# Altium PCB {TEX137}_F2837x_controlCARD_R1.3_PCB_PADS.PcbDoc (part 6 of 6)
Units mm, origin at the board's own origin, x right, y up, seen from the top; angles counter-clockwise.
Board outline 105.77 x 51.09 mm, 10 copper layers (Primary Side, Inner Layer 2, Inner Layer 3, Inner Layer 4, Inner Layer 5, Inner Layer 6, Inner Layer 7, Inner Layer 8, Inner Layer 9, Secondary Side), stack 1.634 mm thick; 292 components, 317 nets, 1400 pads, 1032 vias.
Unrouted connection lines stored in the file: 106.
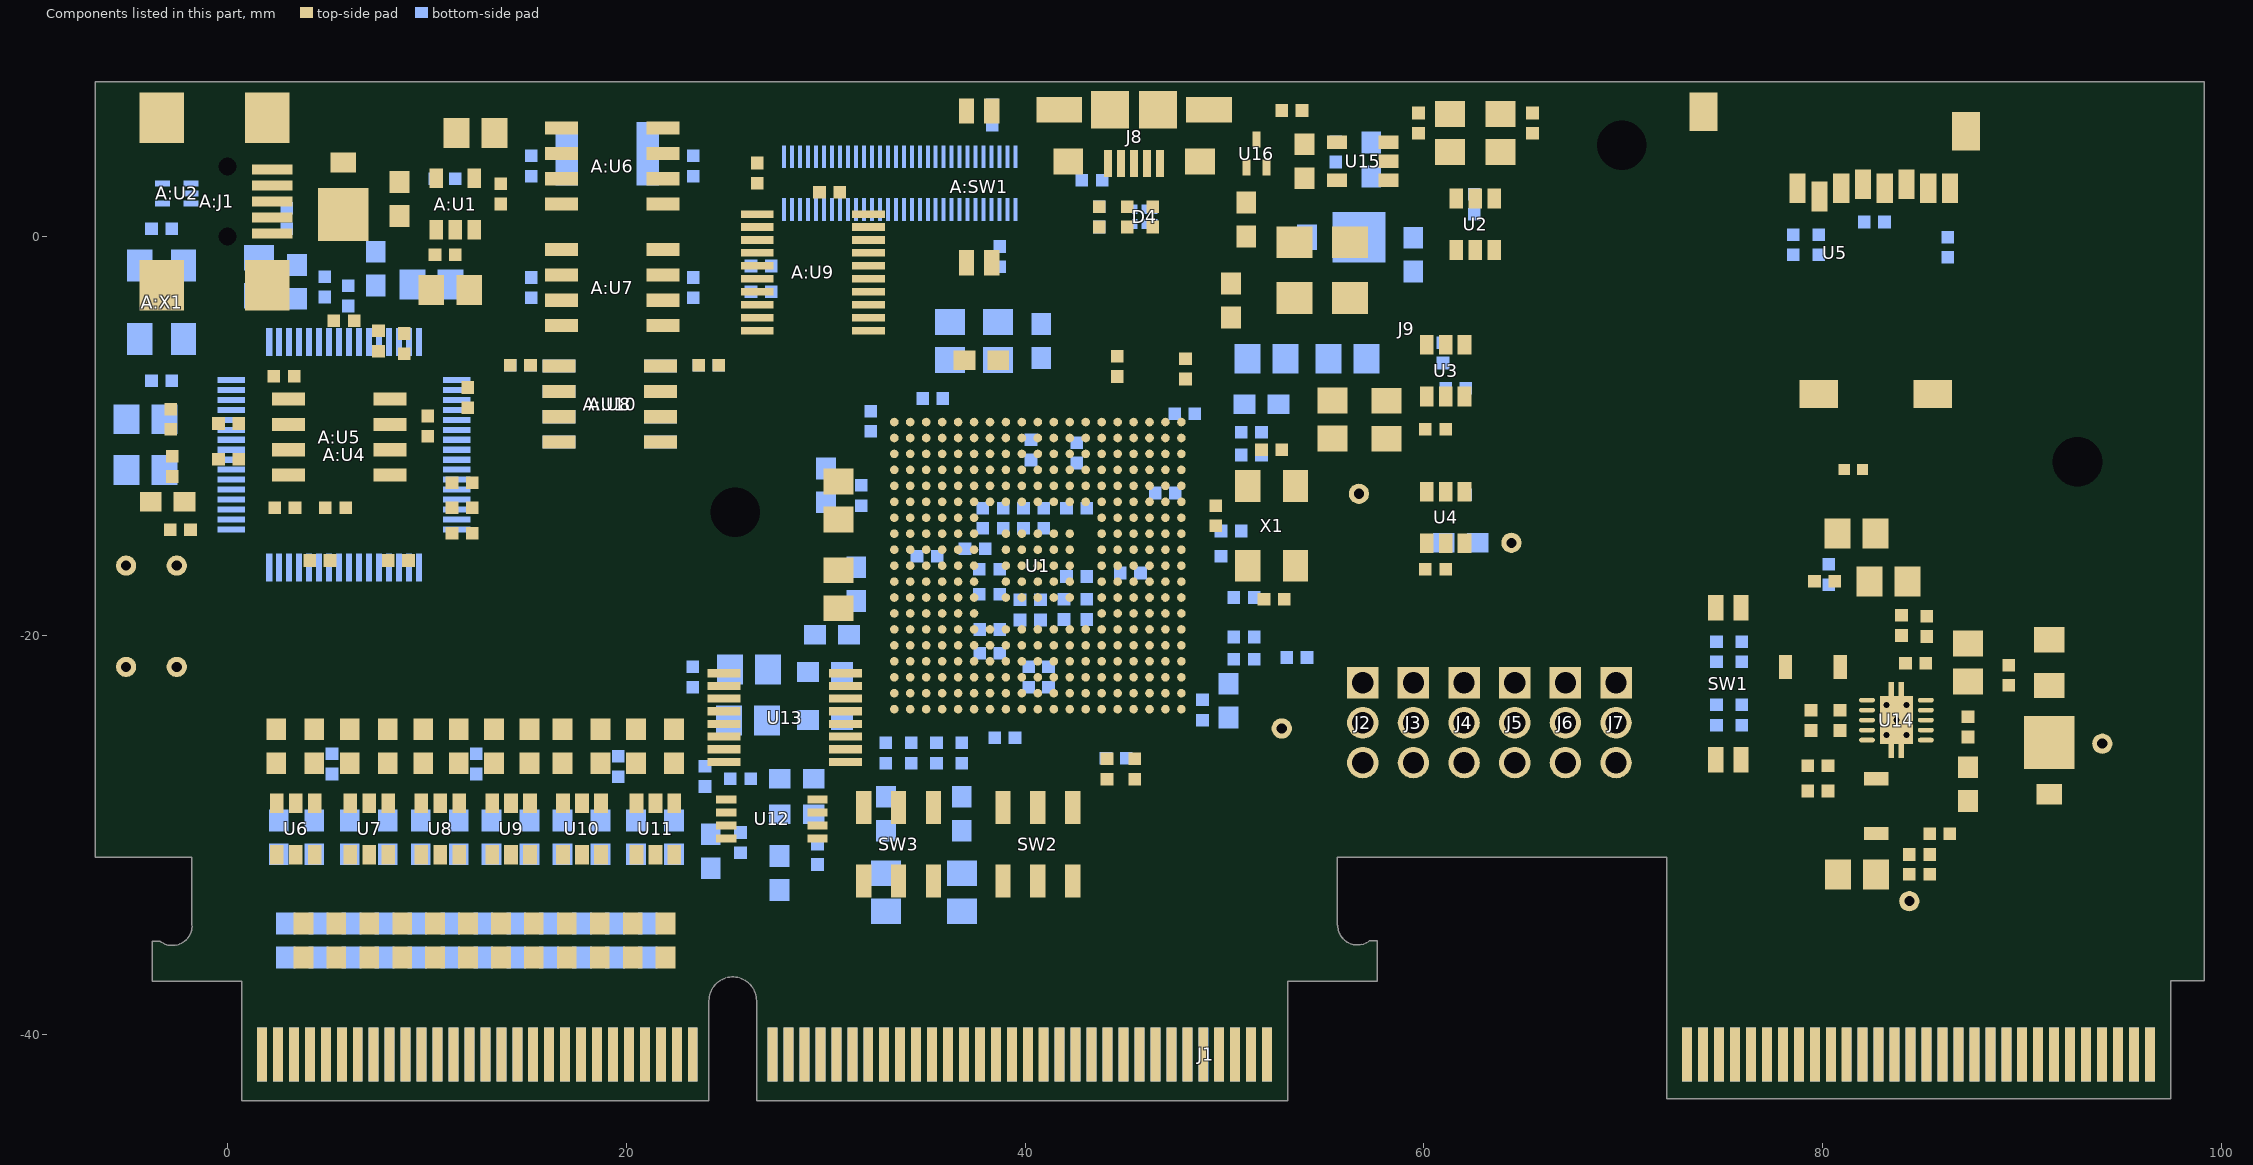
[diagram p14: the components of this part, seen from the top]

## Other copper
Primary Side:
  region net VDD_3V3: 78.359,-21.717 77.343,-21.717 77.343,-12.934 81.026,-12.934 81.026,-15.621 79.883,-15.621 79.883,-20.447 78.359,-20.447 78.359,-21.717
  region net USB_5V0: 92.075,-19.939 90.551,-19.939 90.551,-17.018 92.075,-17.018 92.075,-19.939
  region net HSEC_5V0: 90.043,-27.559 93.218,-27.559 93.218,-29.972 90.043,-29.972 90.043,-27.559
  region net VDD_MCU_3V3: 38.633,-6.046 41.415,-6.046 41.415,-7.29 38.633,-7.29 38.633,-6.046
  region net EMU_5V0: 6.223,2.413 7.747,2.413 7.747,0.254 6.223,0.254 6.223,2.413
  region net $$$4984: 82.423,-23.241 81.661,-23.241 81.661,-22.352 80.391,-22.352 80.391,-20.955 82.423,-20.955 82.423,-23.241
  region net $$$6167: 81.963,-25.184 82.578,-25.184 82.578,-27.328 81.963,-27.328 81.963,-25.184
  text "1" at 129.694,-158.686 h1.91
  text "Primary Side" at 164.875,-159.049 h1.91
Inner Layer 3:
  text "8" at 129.286,-158.686 h1.91
  text "Internal Signal 4" at 162.794,-159.049 h1.91
Inner Layer 4:
  text "4" at 129.241,-158.686 h1.91
  text "Internal Signal 2" at 162.839,-159.049 h1.91
Inner Layer 7:
  text "7" at 129.286,-158.686 h1.91
  text "Internal Signal 3" at 162.839,-159.049 h1.91
Inner Layer 8:
  text "3" at 129.286,-158.686 h1.91
  text "Internal Signal 1" at 163.247,-159.049 h1.91
Secondary Side:
  region net HSEC_5V0: 93.218,-27.559 91.821,-27.559 91.821,-29.972 93.218,-29.972 93.218,-27.559
  region net USB_5V0: 91.948,-19.685 90.678,-19.685 90.678,-17.145 91.948,-17.145 91.948,-19.685
  region net VDD_3V3: 35.992,-3.595 34.709,-3.595 34.709,-5.001 35.992,-5.001 35.992,-3.595
  region net VDD_MCU_3V3: 38.633,-5.944 41.425,-5.944 41.425,-7.29 38.633,-7.29 38.633,-5.944
  text "TEX137" at -5.651,-29.426 h0.76 r270
  text "F2837x controlCARD R1.3" at 96.799,-30.96 h0.76 r270
  text "Pb" at 96.647,-34.437 h0.64 r270
  text "10" at 128.588,-158.686 h1.91
  text "Secondary Side" at 163.129,-159.049 h1.91
Inner Layer 2 (plane layer: these items are gaps in the copper):
  region: 17.78,8.1 20.32,8.1 20.32,-19.837 19.837,-20.32 -6.998,-20.32 -6.998,-17.78 17.145,-17.78 17.78,-17.145 17.78,8.1
  lines w0.254: 18.335,-19.117 18.906,-19.688 ; 18.923,-19.685 37.465,-19.685 37.465,-22.86 38.227,-22.86 38.227,-23.749 37.465,-23.749 37.465,-35.75 36.195,-35.75
  lines w1.27: -3.364,-35.359 -3.77,-35.359 -3.77,-37.341 0.725,-37.341 0.725,-43.335 24.147,-43.335 24.147,-38.331 cw(c25.341,-38.331) 26.535,-38.331 26.535,-43.335 53.176,-43.335 53.176,-37.341 57.672,-37.341 57.672,-35.334 57.266,-35.334 ; -3.363,-35.36 ccw(c-2.766,-34.57) -1.776,-34.521 -1.789,-34.521 -1.789,-31.143 -6.704,-31.143 -6.704,7.752 99.125,7.752 99.125,-37.338 97.464,-37.338 97.464,-43.233 72.183,-43.233 72.183,-31.143 55.666,-31.143 55.666,-34.547 55.678,-34.547 ccw(c56.669,-34.543) 57.267,-35.334
  text "2" at 129.286,-158.686 h1.91
  text "Internal Plane 1" at 163.646,-158.686 h1.91
Inner Layer 5 (plane layer: these items are gaps in the copper):
  region: 57 vertices and 4 holes, not listed, extent -6.64,-43.335 99.125,7.752
  region: 53.848,-26.924 55.753,-26.924 55.753,-30.099 53.848,-30.099 53.848,-26.924
  lines w0.254: 23.495,-38.265 23.495,-41.021 2.286,-41.021 2.286,-36.449 -0.889,-36.449 -0.889,-30.353 -6.071,-30.353 -6.071,-20.32 19.787,-20.32 19.787,-19.812 37.338,-19.812 37.338,-22.987 38.1,-22.987 38.1,-23.622 37.338,-23.622 37.338,-35.623 36.068,-35.623 36.068,-35.877 37.592,-35.877 37.592,-23.876 38.354,-23.876 38.354,-22.733 37.592,-22.733 37.592,-19.558 20.32,-19.558 20.32,7.1 98.45,7.1 98.45,-36.664 96.799,-36.664 96.799,-41.402 73.152,-41.402 73.152,-30.099 55.372,-30.099 55.372,-14.605 82.296,-14.605 82.296,-34.671 88.773,-34.671 88.773,-7.112 54.483,-7.112 54.483,-9.017 50.673,-9.017 50.673,-11.176 35.306,-11.176 35.306,-17.78 39.243,-17.78 39.243,-26.924 54.483,-26.924 54.483,-36.474 51.943,-36.474 51.943,-40.894 27.178,-40.894 27.178,-38.265 ; 23.495,-38.264 cw(c25.336,-38.348) 27.178,-38.264 ; -6.045,-17.78 17.247,-17.78 17.755,-17.272 17.755,7.1 -6.045,7.1 -6.045,-17.78 ; 35.687,-17.526 35.687,-11.557 51.308,-11.557 51.308,-9.398 58.342,-9.398 58.342,-13.991 54.483,-13.991 54.483,-26.416 39.624,-26.416 39.624,-17.526 35.687,-17.526 ; 54.737,-9.064 54.737,-7.62 88.392,-7.62 88.392,-34.29 82.677,-34.29 82.677,-14.097 58.647,-14.097 58.647,-9.064 54.737,-9.064
  text "6" at 129.331,-158.686 h1.91
  text "Internal Plane 3" at 163.238,-158.686 h1.91
Inner Layer 6 (plane layer: these items are gaps in the copper):
  region: 17.78,8.1 20.32,8.1 20.32,-19.799 19.799,-20.32 -6.998,-20.32 -6.998,-17.78 17.145,-17.78 17.78,-17.145 17.78,8.1
  lines w0.254: 22.606,-22.022 2.261,-22.022 2.261,-22.631 -6.718,-22.631 -6.718,-31.179 -1.638,-31.179 -1.638,-33.846 41.783,-33.846 41.783,-25.4 37.46,-25.4 37.46,-23.764 38.245,-23.764 38.245,-22.854 37.47,-22.854 37.47,-19.677 32.766,-19.677 32.766,-19.152 ; 22.606,-22.022 22.606,-19.685 ; 22.606,-22.022 22.606,-19.685 ; 22.606,-22.022 2.286,-22.022 2.286,-22.631 -6.985,-22.631 -6.985,-19.253 18.466,-19.253 18.466,7.696 98.882,7.696 98.882,-23.241 73.965,-23.241 73.965,-17.907 54.28,-17.907 54.28,-27.711 41.783,-27.711 41.783,-25.451 40.411,-25.451 40.411,-19.38 43.409,-19.38 43.409,-24.105 48.92,-24.105 48.92,-16.561 50.952,-16.561 50.952,-6.401 29.312,-6.401 29.312,-11.684 ; 22.606,-19.685 28.778,-19.685 ; 22.606,-19.685 28.778,-19.685 ; 28.778,-19.685 28.778,-19.152 32.766,-19.152 ; 28.778,-19.685 28.778,-19.177 30.404,-19.177 30.404,-11.684 29.312,-11.684 ; 29.312,-11.684 29.312,-6.414 48.146,-6.414 ; 29.312,-11.684 30.378,-11.684 30.378,-19.152 32.766,-19.152 ; 32.766,-19.152 32.766,-19.664 37.483,-19.664 37.483,-22.842 38.247,-22.842 38.247,-23.782 37.465,-23.782 37.465,-25.4 40.374,-25.4 40.374,-19.368 43.422,-19.368 43.422,-24.092 48.908,-24.092 48.908,-16.93 42.05,-16.93 42.05,-13.653 ; 42.05,-13.653 48.146,-13.653 ; 42.05,-13.653 42.05,-16.955 48.908,-16.955 48.908,-16.574 50.94,-16.574 50.94,-6.414 48.146,-6.414 ; 42.05,-13.653 48.146,-13.653 ; 48.146,-13.653 48.146,-6.414 ; 48.146,-13.653 48.146,-6.414
  lines w1.27: -3.364,-35.359 -3.77,-35.359 -3.77,-37.341 0.725,-37.341 0.725,-43.335 24.147,-43.335 24.147,-38.331 cw(c25.341,-38.331) 26.535,-38.331 26.535,-43.335 53.176,-43.335 53.176,-37.341 57.672,-37.341 57.672,-35.334 57.266,-35.334 ; -3.363,-35.36 ccw(c-2.766,-34.57) -1.776,-34.521 -1.789,-34.521 -1.789,-31.143 -6.704,-31.143 -6.704,7.752 99.125,7.752 99.125,-37.338 97.464,-37.338 97.464,-43.233 72.183,-43.233 72.183,-31.143 55.666,-31.143 55.666,-34.547 55.678,-34.547 ccw(c56.669,-34.543) 57.267,-35.334
  text "5" at 129.286,-158.686 h1.91
  text "Internal Plane 2" at 163.238,-158.686 h1.91
Inner Layer 9 (plane layer: these items are gaps in the copper):
  region: 17.78,8.1 20.32,8.1 20.32,-19.799 19.799,-20.32 -6.998,-20.32 -6.998,-17.78 17.145,-17.78 17.78,-17.145 17.78,8.1
  lines w0.254: 39.256,-0.699 39.256,7.556 99.073,7.556 99.073,-21.273 89.929,-21.273 89.929,-1.08 62.279,-1.08 62.279,-3.069 51.956,-3.069 51.956,-0.699 39.256,-0.699
  lines w0.635: -3.364,-35.359 -3.77,-35.359 -3.77,-37.341 0.725,-37.341 0.725,-43.335 24.147,-43.335 24.147,-38.331 cw(c25.341,-38.331) 26.535,-38.331 26.535,-43.335 53.176,-43.335 53.176,-37.341 57.672,-37.341 57.672,-35.334 57.266,-35.334 ; -3.363,-35.36 ccw(c-2.766,-34.57) -1.776,-34.521 -1.789,-34.521 -1.789,-31.143 -6.704,-31.143 -6.704,7.752 99.125,7.752 99.125,-37.338 97.464,-37.338 97.464,-43.233 72.183,-43.233 72.183,-31.143 55.666,-31.143 55.666,-34.547 55.678,-34.547 ccw(c56.669,-34.543) 57.267,-35.334
  lines w1.27: -3.364,-35.359 -3.77,-35.359 -3.77,-37.341 0.725,-37.341 0.725,-43.335 24.147,-43.335 24.147,-38.331 cw(c25.341,-38.331) 26.535,-38.331 26.535,-43.335 53.176,-43.335 53.176,-37.341 57.672,-37.341 57.672,-35.334 57.266,-35.334 ; -3.363,-35.36 ccw(c-2.766,-34.57) -1.776,-34.521 -1.789,-34.521 -1.789,-31.143 -6.704,-31.143 -6.704,7.752 99.125,7.752 99.125,-37.338 97.464,-37.338 97.464,-43.233 72.183,-43.233 72.183,-31.143 55.666,-31.143 55.666,-34.547 55.678,-34.547 ccw(c56.669,-34.543) 57.267,-35.334
  text "9" at 129.331,-158.686 h1.91
  text "Internal Plane 4" at 163.193,-158.686 h1.91

## Silkscreen, mask and mechanical layers (free items; w line width, h text height)
Primary Silkscreen:
  circle w0.152: c32.239,6.147 r0.21
  lines w0.152: 29.934,5.232 30.81,5.232 30.81,6.54 31.674,6.54 31.674,5.956 31.75,5.893 31.775,5.842 31.89,5.791 31.941,5.766 31.839,5.385 31.521,5.385 31.445,5.156 31.801,5.156 31.661,4.572 31.661,4.534 31.712,4.483 31.801,4.432 31.902,4.394 31.979,4.394 32.042,4.407 32.144,4.445 32.144,4.458 32.182,4.496 32.182,4.547 32.182,4.572 32.169,4.597 32.144,4.623 32.118,4.635 32.233,5.156 32.563,5.156 32.614,5.372 32.271,5.372 32.36,5.74 32.423,5.753 32.448,5.766 32.537,5.766 32.588,5.766 32.652,5.791 32.791,5.791 32.804,5.766 32.842,5.766 32.931,5.753 32.982,5.74 33.033,5.677 33.058,5.613 33.033,5.613 33.058,5.563 33.071,5.461 33.084,5.347 33.084,5.232 33.109,5.182 33.16,5.143 33.21,5.055 33.261,4.953 33.261,4.864 33.287,4.737 33.287,4.648 33.249,4.508 33.21,4.458 33.058,4.394 32.88,4.318 32.728,4.267 32.601,4.216 32.461,4.153 32.36,4.102 32.233,4.026 32.182,3.924 32.131,3.759 32.144,3.645 32.169,3.569 32.194,3.518 32.169,3.454 32.131,3.416 32.004,3.429 31.839,3.518 31.623,3.619 31.509,3.759 31.445,3.848 31.382,4.013 31.382,4.077 31.242,4.293 31.14,4.432 31.064,4.508 31.013,4.534 30.886,4.445 30.823,4.394 30.683,4.394 30.505,4.496 30.366,4.712 30.251,4.864 30.035,5.042 ; 31.852,4.648 31.941,4.648 32.182,5.753 32.106,5.753 ; 31.855,4.646 32.096,5.751
  lines w0.203: 29.934,5.232 29.972,5.143 30.035,5.042
  text "Texas" at 25.095,6.502 h0.51
  text "ON" at 34.544,5.893 h0.64
  text "1" at 41.91,5.715 h0.76
  text "Instruments" at 25.197,5.588 h0.51
  text "ISO" at 40.894,3.937 h0.64 r90
  text "ISO" at 35.15,3.75 h0.64 r90
  text "JTAG" at 35.15,-0.06 h0.64 r90
  text "UART" at 40.894,-0.127 h0.64 r90
  text "OFF" at 34.253,-1.933 h0.64
  text "F2837x controlCARD R1.3" at 97.638,-10.566 h0.76 r90
  text "1" at 73.177,-19.189 h0.76
  text "1" at 54.61,-22.86 h0.64
  text "2" at 54.61,-24.765 h0.64
  text "0" at 73.152,-26.67 h0.76
  text "3" at 54.61,-26.797 h0.64
  text "D" at 36.779,-29.057 h0.76
  text "B" at 43.79,-29.057 h0.76
  text "A" at 43.79,-31.496 h0.76
  text "C" at 36.678,-31.524 h0.76
  text "Primary Side Silkscreen" at 157.987,-159.049 h1.91
Secondary Silkscreen:
  region: 97.765,6.655 91.415,6.655 91.415,-6.045 97.765,-6.045 97.765,6.655
  text "For evaluation only;" at 90.818,4.267 h0.76
  text "not FCC approved for resale" at 90.818,2.464 h0.76
  text "Secondary Side Silkscreen" at 156.241,-159.049 h1.91
Drill Drawing:
  drawing of 862 lines, arcs and shapes, not listed
  text "FABRICATION NOTES:" at -169.769,28.674 h1.43
  text "1. NUMBER OF LAYERS = 10" at -169.769,22.959 h1.43
  text "2. UNLESS OTHERWISE SPECIFIED THE PRINTED WIRING BOARD" at -170.246,19.625 h1.43
  text "-264mils" at -5.588,16.637 h1.91 r90
  text "0" at 1.143,16.383 h1.91 r90
  text "SHALL MEET THE REQUIREMENTS OF IPC-6012 CLASS 2." at -166.436,15.815 h1.43
  text "3. ACCEPTABILIITY TO IPC-A-600 CLASS 2." at -170.277,11.656 h1.43
  text "4. MATERIAL:" at -170.246,7.719 h1.43
  text "305mils" at -28.956,6.604 h1.91
  text "A. TYPE: FR4 OR EQUIVALENT" at -164.054,3.909 h1.43
  text "0" at -17.653,1.016 h1.91 r180
  text "B. RAW Cu WEIGHT OUTER LAYERS:       .5 Oz." at -164.054,0.099 h1.43
  text "C. RAW Cu WEIGHT INNER SIGNAL LAYERS: .5 Oz." at -163.902,-3.457 h1.43
  text "D. RAW Cu WEIGHT INNER PLANE LAYERS:  .5 Oz." at -164.054,-7.521 h1.43
  text "E.     HI Tg      RoHS       HALOGEN FREE" at -164.054,-11.331 h1.43
  text "5. PROCESSING:" at -169.769,-15.141 h1.43
  text "A. COPPER THEIVING ALLOWED ON OUTER LAYERS KEEPING A MINIMUM OF 0.200'" at -164.054,-18.951 h1.43
  text "B. REMOVE ALL UNUSED PADS ON ARTWORK ON ALL INNER LAYERS." at -164.054,-22.761 h1.43
  text "C. ETCH DATE CODE AND UL RECOGNIZED VENDOR MARK ON SECONDARY SIDE." at -164.054,-26.571 h1.43
  text "6. IMPEDANCE:" at -169.769,-30.381 h1.43
  text "2PL R39mil" at -32.639,-30.734 h1.91
  text "A. *USE REQUIRMENTS IN STACKUP. FABRICATOR HAS PERMISSION TO CHANGE THICKNESS" at -164.054,-34.191 h1.43
  text "AND TRACE WIDTHS IN ORDER TO MEET IMPEDANCE REQUIRMENTS." at -160.244,-38.001 h1.43
  text "B. NON-CONTROLLED TRACES TO BE WITHIN 20% OF SPECIFIED APERTURE" at -164.054,-41.811 h1.43
  text "-1706mils" at -33.274,-44.704 h1.91
  text "VALUE IN ARTWORK." at -160.244,-45.621 h1.43
  text "7. Cu PLATING:" at -169.769,-49.431 h1.43
  text "VIEW A-A" at -33.731,-52.197 h1.91
  text "A. UNLESS OTHERWISE SPECIFIED, HOLE DIMENSIONS ARE FOR FINISHED HOLES." at -164.054,-53.241 h1.43
  text "B. UNLESS OTHERWISE SPECIFIED, HOLE BARREL THICKNESS TO BE 0.001\" MIN." at -164.054,-57.051 h1.43
  text "8. FINISH PLATING:" at -169.769,-60.861 h1.43
  text "FINISH ALL EXPOSED PADS WITH:" at -145.004,-60.861 h1.43
  text "STACKUP IMPEDANCE PER DOC -  10L WILLOW SPRINGS TI-50_90_100 06172013.pdf" at -7.493,-62.23 h0.76
  text "ELECTROLESS NICKEL/IMMERSION GOLD (ENIG), FOR COMPONENT AREA" at -154.529,-64.671 h1.43
  text "A." at -162.408,-64.724 h1.43
  text "Layer 1 - Primary Side" at 47.561,-67.021 h0.95
  text "1/2 Oz. Raw, 1 1/2 Oz. Finished" at 12.76,-67.132 h0.64
  text "IMMERSION SILVER (IMM AG)" at -154.529,-68.481 h1.43
  text "IMPEDANCE - 5.3 - 50SE, 5/6 - 90DIF, 4.5/6.5 - 100DIF" at 56.769,-69.469 h0.76
  text "Er = 4.3 - THICKNESS = FABRICATOR MAY DETERMINE" at 4.577,-70.888 h0.79
  text "TIN/LEAD (HASL)" at -154.529,-72.291 h1.43
  text "1/2 Oz. Cu" at 17.498,-74.721 h0.64
  text "Layer 2 - Internal Plane" at 47.561,-74.936 h0.95
  text "HARD GOLD OVER NICKEL  30u/80u, ON EDGEFINGERS" at -154.529,-76.101 h1.43
  text "B." at -161.874,-76.25 h1.43
  text "Er = 4.3 - THICKNESS = FABRICATOR MAY DETERMINE" at 4.577,-78.508 h0.79
  text "WHITE TIN" at -154.529,-79.911 h1.43
  text "Layer 3 - Internal Signal" at 47.561,-82.261 h0.95
  text "1/2 Oz. Cu" at 17.498,-82.341 h0.64
  text "ORGANIC SOLDERABILITY PRESERVATIVE (OSP)" at -154.529,-83.721 h1.43
  text "IMPEDANCE - 5.5 - 50SE, 5.6/5.4 - 90DIF, 4.3/4.7 - 100DIF" at 58.039,-84.328 h0.76
  text "Er = 4.3 - THICKNESS = FABRICATOR MAY DETERMINE" at 4.577,-86.128 h0.79
  text "LEAD FREE HASL" at -154.529,-87.531 h1.43
  text "1/2 Oz. Cu" at 17.498,-89.961 h0.64
  text "Layer 4 - Internal Signal" at 47.561,-90.199 h0.95
  text "9. SOLDERMASK:" at -169.769,-91.341 h1.43
  text "IMPEDANCE - 5.5 - 50SE, 4.3/4.7 - 100DIF" at 57.912,-92.583 h0.76
  text "30" at 161.244,-92.976 h1.27
  text "Er = 4.3 - THICKNESS = FABRICATOR MAY DETERMINE" at 4.577,-93.748 h0.79
  text "A. LPI GREEN SOLDER MASK OVER BARE COPPER BOTH SIDES." at -164.054,-95.151 h1.43
  text "Layer 5 - Internal Plane" at 47.561,-97.479 h0.95
  text "1/2 Oz. Cu" at 17.498,-97.581 h0.64
  text "B. SOLDER MASK REGISTRATION TO BE WITHIN +/-.003\" OF RELEVANT LAYER." at -164.054,-98.961 h1.43
  text "Er = 4.3 - THICKNESS = FABRICATOR MAY DETERMINE" at 4.577,-101.368 h0.79
  text "0.062\" +/- 0.006\"" at -23.228,-101.516 h0.95
  text "C. NO MASK TO APPEAR ON PADS" at -164.054,-102.771 h1.43
  text "1/2 Oz. Cu" at 17.498,-105.201 h0.64
  text "Layer 6 - Internal Plane" at 47.561,-105.416 h0.95
  text "10. SILKSCREEN:" at -169.769,-106.581 h1.43
  text "Er = 4.3 - THICKNESS = FABRICATOR MAY DETERMINE" at 4.577,-108.988 h0.79
  text "A. USE WHITE NON-CONDUCTIVE INK." at -164.054,-110.391 h1.43
  text "IMPEDANCE - 5.5 - 50SE, 5.6/5.4 - 90DIF" at 58.42,-110.744 h0.76
  text "Layer 7 - Internal Signal" at 47.561,-112.741 h0.95
  text "1/2 Oz. Cu" at 17.498,-112.821 h0.64
  text "B. NO SILKSCREEN TO APPEAR ON PADS." at -164.054,-114.201 h1.43
  text "Er = 4.3 - THICKNESS = FABRICATOR MAY DETERMINE" at 4.577,-116.608 h0.79
  text "11. WARP AND TWIST NOT TO EXCEED .010 INCH/INCH." at -169.769,-118.011 h1.43
  text "IMPEDANCE - 5.5 - 50SE, 5.6/5.4 - 90DIF, 4.3/4.7 - 100DIF" at 58.674,-118.745 h0.76
  text "0.015\"" at 160.731,-119.583 h1.27
  text "1/2 Oz. Cu" at 17.498,-120.441 h0.64
  text "Layer 8 - Internal Signal" at 47.561,-120.679 h0.95
  text "12. MILLING:" at -169.769,-121.821 h1.43
  text "Er = 4.3 - THICKNESS = FABRICATOR MAY DETERMINE" at 4.577,-124.228 h0.79
  text "A. ALL BOARD DIMENSIONS TO BE HELD TO WITHIN 0.005\"." at -164.054,-125.631 h1.43
  text "VIEW A-A" at 145.872,-125.933 h1.91
  text "Layer 9 - Internal Plane" at 47.561,-127.959 h0.95
  text "1/2 Oz. Cu" at 17.498,-128.061 h0.64
  text "B. IF NO DIMENSIONS PRESENT, USE BOARD OUTLINE IN DD.PHO (THIS DRAWING)" at -164.054,-129.441 h1.43
  text "ROTATED 90 DEG." at 144.602,-129.743 h1.27
  text "Er = 4.3 - THICKNESS = FABRICATOR MAY DETERMINE" at 4.577,-131.848 h0.79
  text "TO FEED DIRECTLY INTO MILLING PROCESSOR." at -160.244,-133.251 h1.43
  text "IMPEDANCE - 5.3 - 50SE, 5/6 - 90DIF, 4.5/6.5 - 100DIF" at 58.674,-133.477 h0.76
  text "1/2 Oz. Raw Cu, 1 1/2 Oz. Finished" at 11.946,-135.712 h0.64
  text "Layer 10 - Secondary Side" at 47.561,-135.919 h0.95
  text "C. PALLETIZE 2UP" at -163.906,-137.49 h1.43
Primary Assembly Drawing:
  lines w0.025: -61.368,-61.835 -58.287,-61.835 ; -61.368,-29.173 -58.287,-29.173 ; -61.368,-0.209 -58.287,-0.209 ; -60.145,-30.73 -58.49,-29.172 -60.145,-27.646 ; -33.636,-96.963 -33.636,-93.881 ; -33.636,35.535 -33.636,38.616 ; -8.985,-96.963 -8.985,-93.881 ; -8.985,35.535 -8.985,38.616 ; 17.206,-96.963 17.206,-93.881 ; 17.206,35.535 17.206,38.616 ; 24.365,-93.843 24.365,-69.167 ; 24.381,-83.403 48.107,-83.403 ; 24.381,-81.505 48.107,-81.505 ; 24.381,-79.607 48.107,-79.607 ; 24.381,-77.709 48.107,-77.709 ; 24.381,-75.811 48.107,-75.811 ; 24.381,-73.913 48.107,-73.913 ; 24.381,-71.54 48.107,-71.54 ; 24.381,-69.167 144.911,-69.167 ; 36.244,-83.403 36.244,-71.54 ; 41.81,37.369 43.397,35.533 44.992,37.369 ; 43.398,-96.963 43.398,-93.881 ; 43.398,35.535 43.398,38.616 ; 48.107,-93.843 48.107,-69.167 ; 48.107,-73.619 72.308,-73.619 ; 69.589,-96.963 69.589,-93.881 ; 69.589,35.535 69.589,38.616 ; 72.308,-93.843 72.308,-69.167 ; 72.308,-91.945 96.034,-91.945 ; 72.308,-90.046 96.034,-90.046 ; 72.308,-88.148 96.034,-88.148 ; 72.308,-86.25 96.034,-86.25 144.911,-86.25 ; 72.308,-84.352 96.034,-84.352 ; 72.308,-82.454 96.034,-82.454 ; 72.308,-80.556 96.034,-80.556 ; 72.308,-78.658 96.034,-78.658 ; 72.308,-76.76 96.034,-76.76 ; 72.308,-74.862 96.034,-74.862 ; 72.308,-72.964 96.034,-72.964 ; 72.308,-71.065 96.034,-71.065 ; 89.427,-93.843 89.427,-69.167 ; 95.78,-96.963 95.78,-93.881 ; 95.78,35.535 95.78,38.616 ; 96.034,-75.336 144.911,-75.336 ; 96.061,-90.97 144.803,-90.97 ; 96.07,-93.843 96.07,-69.167 ; 99.831,-90.995 99.831,-86.25 ; 101.943,26.291 145.082,26.291 ; 101.943,28.14 145.082,28.14 ; 101.943,29.988 145.082,29.988 ; 101.943,31.837 145.082,31.837 ; 101.943,33.686 145.082,33.686 ; 101.943,35.535 101.943,24.442 145.082,24.442 ; 104.408,24.442 104.408,33.686 ; 105.525,-93.843 105.525,-90.995 ; 106.873,24.442 106.873,33.686 ; 112.168,-90.995 112.168,-86.25 ; 120.431,-96.963 120.431,-93.881 ; 120.431,35.535 120.431,38.616 ; 128.302,-93.843 128.302,-90.995 ; 133.989,24.442 133.989,33.686 ; 138.919,24.442 138.919,33.686 ; 140.64,-90.995 140.64,-86.25 ; 145.082,-61.835 148.163,-61.835 ; 145.082,-29.173 148.163,-29.173 ; 145.082,-0.209 148.163,-0.209 ; 146.91,-30.714 144.826,-29.188 146.91,-27.657 ; 146.931,-30.714 146.931,-27.633 ; 43.398,-93.881 44.938,-95.73 41.857,-95.73 43.398,-93.881 ; -61.368,-96.963 -61.368,38.616 148.163,38.616 148.163,-96.963 -61.368,-96.963 ; -58.479,-93.881 -58.479,35.535 144.889,35.535 144.889,-93.881 -58.479,-93.881
  text "2" at 106.819,36.213 h1.32
  text "8" at -47.248,36.151 h1.32
  text "7" at -21.057,36.151 h1.32
  text "6" at 3.594,36.151 h1.32
  text "5" at 29.786,36.151 h1.32
  text "4" at 54.436,36.151 h1.32
  text "3" at 82.168,36.151 h1.32
  text "1" at 133.01,36.151 h1.32
  text "REVISIONS" at 120.069,34.302 h0.55
  text "REV." at 102.875,32.454 h0.35
  text "REV." at 104.97,32.454 h0.35
  text "DESCRIPTION" at 117.296,32.454 h0.35
  text "DATE" at 135.475,32.454 h0.35
  text "APPROVED" at 140.097,32.454 h0.35
  text "Notes:" at -53.874,30.01 h1.91
  text "1) Refer to BOM for stuffing options." at -52.159,26.867 h1.19
  text "2) Observe polarity on diodes and capacitors." at -52.636,23.914 h1.19
  text "D" at -60.189,15.814 h1.32
  text "D" at 146.26,15.814 h1.32
  text "C" at -60.189,-14.999 h1.32
  text "C" at 146.26,-14.999 h1.32
  text "B" at -60.189,-45.812 h1.32
  text "B" at 146.26,-45.812 h1.32
  text "Primary Side" at 28.941,-55.626 h3.39
  text "DWN:" at 73.085,-70.446 h0.54
  text "APPLICATION" at 32.7,-70.523 h0.54
  text "CONTRACT NO." at 49.309,-70.523 h0.54
  text "www.wstscorp.com    10/15" at 78.389,-70.612 h0.68
  text "CHK:" at 73.085,-72.345 h0.54
  text "TEXAS INSTRUMENTS" at 107.719,-72.811 h1.69
  text "USED ON" at 27.768,-73.056 h0.54
  text "NEXT ASSY." at 38.682,-73.056 h0.54
  text "P.E.:" at 73.085,-74.243 h0.54
  text "UNLESS OTHERWISE SPECIFIED" at 49.359,-75.192 h0.68
  text "DES.ENG.:" at 73.085,-76.141 h0.54
  text "TITLE:" at 97.237,-76.76 h0.54
  text "1. TOLERANCES:" at 49.359,-77.802 h0.54
  text "P.C.:" at 73.085,-78.039 h0.54
  text "ASSEMBLY DRAWING," at 110.841,-78.248 h1.36
  text "A" at -60.189,-78.475 h1.32
  text "A" at 146.26,-78.475 h1.32
  text "+" at 57.9,-78.751 h0.27
  text "0.26 (.010)" at 59.324,-79.225 h0.54
  text "-" at 57.9,-79.365 h0.27
  text "LINEAR =" at 51.02,-79.462 h0.54
  text "Q.C.:" at 73.085,-79.937 h0.54
  text "0" at 62.408,-80.174 h0.27
  text "+" at 58.612,-80.412 h0.27
  text "ANGULAR =" at 51.02,-80.886 h0.54
  text "0.50" at 60.036,-80.886 h0.54
  text "-" at 58.612,-81.026 h0.27
  text "C.M.:" at 73.085,-82.072 h0.54
  text "F2837x controlCARD" at 112.815,-82.236 h1.02
  text "2. ALL DIMENSIONS ARE IN" at 49.359,-83.733 h0.54
  text "REL:" at 73.085,-83.733 h0.54
  text "MATERIAL:  SEE NOTE" at 25.633,-85.157 h0.54
  text "MM (INCHES)." at 51.02,-85.157 h0.54
  text "MFG:" at 73.085,-85.631 h0.54
  text "FINISH:  SEE NOTE" at 25.633,-86.818 h0.54
  text "SIZE" at 96.763,-87.437 h0.54
  text "CAGE CODE NO." at 101.271,-87.437 h0.54
  text "DRAWING NO." at 113.371,-87.437 h0.54
  text "REV:" at 141.606,-87.437 h0.54
  text "ENG.MGR:" at 73.085,-87.529 h0.54
  text "3. INTERPRET DRAWING IN" at 49.359,-88.716 h0.54
  text "OTHER:" at 73.085,-89.428 h0.54
  text "F2837x controlCARD" at 116.008,-89.425 h1.14
  text "1.3" at 141.686,-89.814 h1.14
  text "C" at 97.675,-90.073 h1.36
  text "ACCORDANCE WITH" at 51.02,-90.139 h0.54
  text "OTHER:" at 73.085,-91.326 h0.54
  text "DOD-STD-100." at 51.02,-91.563 h0.54
  text "SCALE:" at 96.988,-92.761 h0.54
  text "SHEET     OF" at 129.348,-92.761 h0.54
  text "DO NOT SCALE DRAWING" at 28.183,-92.788 h0.54
  text "1:1" at 102.233,-92.823 h0.68
  text "1    2" at 133.653,-92.914 h0.68
  text "OTHER:" at 73.085,-93.224 h0.54
  text "2" at 106.819,-96.285 h1.32
  text "8" at -47.248,-96.346 h1.32
  text "7" at -21.057,-96.346 h1.32
  text "6" at 3.594,-96.346 h1.32
  text "5" at 29.786,-96.346 h1.32
  text "4" at 54.436,-96.346 h1.32
  text "3" at 82.168,-96.346 h1.32
  text "1" at 133.01,-96.346 h1.32
Secondary Assembly Drawing:
  circle w0.025: c27.953,1.321 r0.162
  lines w0.025: -59.644,-60.299 -56.563,-60.299 ; -59.644,-27.636 -56.563,-27.636 ; -59.644,1.328 -56.563,1.328 ; -58.412,-29.177 -58.412,-26.096 ; -58.391,-29.177 -56.307,-27.651 -58.391,-26.12 ; -56.563,25.979 -13.424,25.979 -13.424,37.072 ; -56.563,27.828 -13.424,27.828 ; -56.563,29.676 -13.424,29.676 ; -56.563,31.525 -13.424,31.525 ; -56.563,33.374 -13.424,33.374 ; -56.563,35.223 -13.424,35.223 ; -56.392,-84.714 -7.515,-84.714 16.211,-84.714 ; -56.392,-73.799 -7.515,-73.799 ; -56.392,-67.631 64.138,-67.631 ; -56.284,-89.434 -7.542,-89.434 ; -52.121,-89.459 -52.121,-84.714 ; -50.4,25.979 -50.4,35.223 ; -45.47,25.979 -45.47,35.223 ; -39.783,-92.306 -39.783,-89.459 ; -31.912,-95.426 -31.912,-92.345 ; -31.912,37.072 -31.912,40.153 ; -23.649,-89.459 -23.649,-84.714 ; -18.354,25.979 -18.354,35.223 ; -17.006,-92.306 -17.006,-89.459 ; -15.889,25.979 -15.889,35.223 ; -11.312,-89.459 -11.312,-84.714 ; -7.551,-92.306 -7.551,-67.631 ; -7.515,-90.408 16.211,-90.408 ; -7.515,-88.51 16.211,-88.51 ; -7.515,-86.612 16.211,-86.612 ; -7.515,-82.815 16.211,-82.815 ; -7.515,-80.917 16.211,-80.917 ; -7.515,-79.019 16.211,-79.019 ; -7.515,-77.121 16.211,-77.121 ; -7.515,-75.223 16.211,-75.223 ; -7.515,-73.325 16.211,-73.325 ; -7.515,-71.427 16.211,-71.427 ; -7.515,-69.529 16.211,-69.529 ; -7.261,-95.426 -7.261,-92.345 ; -7.261,37.072 -7.261,40.153 ; -0.908,-92.306 -0.908,-67.631 ; 16.211,-92.306 16.211,-67.631 ; 16.211,-72.082 40.412,-72.082 ; 18.93,-95.426 18.93,-92.345 ; 18.93,37.072 18.93,40.153 ; 40.412,-92.306 40.412,-67.631 ; 40.412,-81.866 64.138,-81.866 ; 40.412,-79.968 64.138,-79.968 ; 40.412,-78.07 64.138,-78.07 ; 40.412,-76.172 64.138,-76.172 ; 40.412,-74.274 64.138,-74.274 ; 40.412,-72.376 64.138,-72.376 ; 40.412,-70.003 64.138,-70.003 ; 43.527,38.906 45.122,37.069 46.709,38.906 ; 45.121,-95.426 45.121,-92.345 ; 45.121,37.072 45.121,40.153 ; 52.275,-81.866 52.275,-70.003 ; 64.154,-92.306 64.154,-67.631 ; 71.313,-95.426 71.313,-92.345 ; 71.313,37.072 71.313,40.153 ; 97.504,-95.426 97.504,-92.345 ; 97.504,37.072 97.504,40.153 ; 122.155,-95.426 122.155,-92.345 ; 122.155,37.072 122.155,40.153 ; 146.806,-60.299 149.887,-60.299 ; 146.806,-27.636 149.887,-27.636 ; 146.806,1.328 149.887,1.328 ; 148.664,-29.193 147.009,-27.635 148.664,-26.109 ; 45.121,-92.345 43.581,-94.193 46.662,-94.193 45.121,-92.345 ; -59.644,-95.426 -59.644,40.153 149.887,40.153 149.887,-95.426 -59.644,-95.426 ; -56.37,-92.345 -56.37,37.072 146.998,37.072 146.998,-92.345 -56.37,-92.345
  text "2" at -18.046,37.75 h1.32
  text "1" at -44.237,37.688 h1.32
  text "3" at 6.605,37.688 h1.32
  text "4" at 34.337,37.688 h1.32
  text "5" at 58.987,37.688 h1.32
  text "6" at 85.179,37.688 h1.32
  text "7" at 109.83,37.688 h1.32
  text "8" at 136.021,37.688 h1.32
  text "REVISIONS" at -31.296,35.839 h0.55
  text "APPROVED" at -51.324,33.99 h0.35
  text "DATE" at -46.702,33.99 h0.35
  text "DESCRIPTION" at -28.523,33.99 h0.35
  text "REV." at -16.197,33.99 h0.35
  text "REV." at -14.102,33.99 h0.35
  text "Notes:" at 142.647,31.547 h1.91
  text "1) Refer to BOM for stuffing options." at 140.932,28.404 h1.19
  text "2) Observe polarity on diodes and capacitors." at 141.409,25.451 h1.19
  text "D" at -57.487,17.351 h1.32
  text "D" at 148.962,17.351 h1.32
  text "C" at -57.487,-13.462 h1.32
  text "C" at 148.962,-13.462 h1.32
  text "B" at -57.487,-44.276 h1.32
  text "B" at 148.962,-44.276 h1.32
  text "Secondary Side" at 57.985,-55.207 h3.39
  text "DWN:" at 15.688,-68.91 h0.54
  text "CONTRACT NO." at 39.464,-68.986 h0.54
  text "APPLICATION" at 56.073,-68.986 h0.54
  text "www.wstscorp.com      10/15" at 11.466,-69.112 h0.68
  text "CHK:" at 15.688,-70.808 h0.54
  text "TEXAS INSTRUMENTS" at -18.232,-71.275 h1.69
  text "NEXT ASSY." at 50.091,-71.52 h0.54
  text "USED ON" at 61.005,-71.52 h0.54
  text "P.E.:" at 15.688,-72.706 h0.54
  text "UNLESS OTHERWISE SPECIFIED" at 39.414,-73.655 h0.68
  text "DES.ENG.:" at 15.688,-74.604 h0.54
  text "TITLE:" at -8.464,-75.223 h0.54
  text "1. TOLERANCES:" at 39.414,-76.265 h0.54
  text "P.C.:" at 15.688,-76.502 h0.54
  text "ASSEMBLY DRAWING," at -22.068,-76.711 h1.36
  text "A" at -57.487,-76.938 h1.32
  text "A" at 148.962,-76.938 h1.32
  text "+" at 30.873,-77.214 h0.27
  text "0.26 (.010)" at 29.449,-77.689 h0.54
  text "-" at 30.873,-77.829 h0.27
  text "LINEAR =" at 37.753,-77.926 h0.54
  text "Q.C.:" at 15.688,-78.4 h0.54
  text "0" at 26.365,-78.638 h0.27
  text "+" at 30.161,-78.875 h0.27
  text "0.50" at 28.737,-79.349 h0.54
  text "ANGULAR =" at 37.753,-79.349 h0.54
  text "-" at 30.161,-79.489 h0.27
  text "C.M.:" at 15.688,-80.536 h0.54
  text "F28335 controlCARD R3.0" at -22.045,-80.699 h1.02
  text "REL:" at 15.688,-82.197 h0.54
  text "2. ALL DIMENSIONS ARE IN" at 39.414,-82.197 h0.54
  text "MM (INCHES)." at 37.753,-83.62 h0.54
  text "MATERIAL:  SEE NOTE" at 63.14,-83.62 h0.54
  text "MFG:" at 15.688,-84.095 h0.54
  text "FINISH:  SEE NOTE" at 63.14,-85.281 h0.54
  text "REV:" at -52.833,-85.9 h0.54
  text "DRAWING NO." at -24.598,-85.9 h0.54
  text "CAGE CODE NO." at -12.498,-85.9 h0.54
  text "SIZE" at -7.99,-85.9 h0.54
  text "ENG.MGR:" at 15.688,-85.993 h0.54
  text "3. INTERPRET DRAWING IN" at 39.414,-87.179 h0.54
  text "OTHER:" at 15.688,-87.891 h0.54
  text "F28335 controlCARD" at -31.615,-88.061 h1.19
  text "1.3" at -52.942,-88.252 h1.14
  text "C" at -8.902,-88.536 h1.36
  text "ACCORDANCE WITH" at 37.753,-88.603 h0.54
  text "OTHER:" at 15.688,-89.789 h0.54
  text "DOD-STD-100." at 37.753,-90.026 h0.54
  text "SHEET     OF" at -40.575,-91.224 h0.54
  text "SCALE:" at -8.215,-91.224 h0.54
  text "DO NOT SCALE DRAWING" at 60.59,-91.251 h0.54
  text "1:1" at -13.46,-91.287 h0.68
  text "2    2" at -44.88,-91.378 h0.68
  text "OTHER:" at 15.688,-91.687 h0.54
  text "2" at -18.046,-94.748 h1.32
  text "1" at -44.237,-94.81 h1.32
  text "3" at 6.605,-94.81 h1.32
  text "4" at 34.337,-94.81 h1.32
  text "5" at 58.987,-94.81 h1.32
  text "6" at 85.179,-94.81 h1.32
  text "7" at 109.83,-94.81 h1.32
  text "8" at 136.021,-94.81 h1.32
Drill Drawing Format:
  lines w0.025: -190.2,-132.921 -183.85,-132.921 ; -190.2,-60.226 -183.85,-60.226 ; -190.2,-0.536 -183.85,-0.536 ; -187.68,-63.434 -184.27,-60.223 -187.68,-57.079 ; -133.05,-199.926 -133.05,-193.576 ; -133.05,73.124 -133.05,79.474 ; -82.25,-199.926 -82.25,-193.576 ; -82.25,73.124 -82.25,79.474 ; -28.275,-199.926 -28.275,-193.576 ; -28.275,73.124 -28.275,79.474 ; 22.428,76.903 25.699,73.119 28.986,76.903 ; 25.7,-199.926 25.7,-193.576 ; 25.7,73.124 25.7,79.474 ; 73.527,-193.514 73.527,-160.494 ; 73.549,-179.544 105.299,-179.544 ; 73.549,-177.004 105.299,-177.004 ; 73.549,-174.464 105.299,-174.464 ; 73.549,-171.924 105.299,-171.924 ; 73.549,-169.384 105.299,-169.384 ; 73.549,-166.844 105.299,-166.844 ; 73.549,-163.669 105.299,-163.669 ; 73.549,-160.494 234.839,-160.494 ; 79.675,-199.926 79.675,-193.576 ; 79.675,73.124 79.675,79.474 ; 89.424,-179.544 89.424,-163.669 ; 105.299,-193.514 105.299,-160.494 ; 105.299,-166.451 137.684,-166.451 ; 133.65,-199.926 133.65,-193.576 ; 133.65,73.124 133.65,79.474 ; 137.684,-193.514 137.684,-160.494 ; 137.684,-190.974 169.434,-190.974 ; 137.684,-188.434 169.434,-188.434 ; 137.684,-185.894 169.434,-185.894 ; 137.684,-183.354 169.434,-183.354 234.839,-183.354 ; 137.684,-180.814 169.434,-180.814 ; 137.684,-178.274 169.434,-178.274 ; 137.684,-175.734 169.434,-175.734 ; 137.684,-173.194 169.434,-173.194 ; 137.684,-170.654 169.434,-170.654 ; 137.684,-168.114 169.434,-168.114 ; 137.684,-165.574 169.434,-165.574 ; 137.684,-163.034 169.434,-163.034 ; 146.35,54.074 235.25,54.074 ; 146.35,57.884 235.25,57.884 ; 146.35,61.694 235.25,61.694 ; 146.35,65.504 235.25,65.504 ; 146.35,69.314 235.25,69.314 ; 146.35,73.124 146.35,50.264 235.25,50.264 ; 151.43,50.264 151.43,69.314 ; 156.51,50.264 156.51,69.314 ; 160.591,-193.514 160.591,-160.494 ; 169.434,-168.749 234.839,-168.749 ; 169.469,-189.67 234.695,-189.67 ; 169.481,-193.514 169.481,-160.494 ; 174.514,-189.704 174.514,-183.354 ; 182.134,-193.514 182.134,-189.704 ; 184.45,-199.926 184.45,-193.576 ; 184.45,73.124 184.45,79.474 ; 191.024,-189.704 191.024,-183.354 ; 212.39,50.264 212.39,69.314 ; 212.614,-193.514 212.614,-189.704 ; 222.55,50.264 222.55,69.314 ; 229.124,-189.704 229.124,-183.354 ; 235.25,-60.226 241.6,-60.226 ; 235.25,-0.536 241.6,-0.536 ; 235.707,-127.13 242.057,-127.13 ; 239.017,-63.401 234.723,-60.256 239.017,-57.101 ; 239.06,-63.401 239.06,-57.051 ; 25.7,-193.576 28.875,-197.386 22.525,-197.386 25.7,-193.576 ; -190.2,-199.926 -190.2,79.474 241.6,79.474 241.6,-199.926 -190.2,-199.926 ; -184.247,-193.576 -184.247,73.124 234.853,73.124 234.853,-193.576 -184.247,-193.576
  text "2" at 156.383,74.521 h2.72
  text "8" at -161.117,74.394 h2.72
  text "7" at -107.142,74.394 h2.72
  text "6" at -56.342,74.394 h2.72
  text "5" at -2.367,74.394 h2.72
  text "4" at 48.433,74.394 h2.72
  text "3" at 105.583,74.394 h2.72
  text "1" at 210.358,74.394 h2.72
  text "REVISIONS" at 183.688,70.584 h1.13
  text "REV." at 148.255,66.774 h0.73
  text "REV." at 152.573,66.774 h0.73
  text "DESCRIPTION" at 177.973,66.774 h0.73
  text "DATE" at 215.438,66.774 h0.73
  text "APPROVED" at 224.963,66.774 h0.73
  text "D" at -187.787,32.484 h2.72
  text "D" at 237.663,32.484 h2.72
  text "C" at -187.787,-31.016 h2.72
  text "C" at 237.663,-31.016 h2.72
  text "B" at -187.787,-94.516 h2.72
  text "B" at 237.663,-94.516 h2.72
  text "A" at 237.663,-161.826 h2.72
  text "DWN:" at 138.892,-162.206 h0.73
  text "APPLICATION" at 84.85,-162.308 h0.73
  text "CONTRACT NO." at 107.075,-162.308 h0.73
  text "wstscorp.com      10/15" at 147.147,-162.538 h0.91
  text "CHK:" at 138.892,-164.746 h0.73
  text "TEXAS INSTRUMENTS" at 184.47,-165.662 h2.27
  text "USED ON" at 78.249,-165.698 h0.73
  text "NEXT ASSY." at 92.854,-165.698 h0.73
  text "A" at -187.787,-167.211 h2.72
  text "P.E.:" at 138.892,-167.286 h0.73
  text "UNLESS OTHERWISE SPECIFIED" at 107.142,-168.556 h0.91
  text "DES.ENG.:" at 138.892,-169.826 h0.73
  text "TITLE:" at 171.212,-170.654 h0.73
  text "1. TOLERANCES:" at 107.142,-172.048 h0.73
  text "P.C.:" at 138.892,-172.366 h0.73
  text "+" at 118.572,-173.318 h0.36
  text "0.26 (.010)" at 120.477,-173.953 h0.73
  text "-" at 118.572,-174.141 h0.36
  text "LINEAR =" at 109.364,-174.271 h0.73
  text "Q.C.:" at 138.892,-174.906 h0.73
  text "FABRICATION DRAWING," at 188.227,-174.983 h1.81
  text "0" at 124.604,-175.223 h0.36
  text "+" at 119.524,-175.541 h0.36
  text "ANGULAR =" at 109.364,-176.176 h0.73
  text "0.50" at 121.429,-176.176 h0.73
  text "-" at 119.524,-176.363 h0.36
  text "C.M.:" at 138.892,-177.763 h0.73
  text "F28335 controlCARD" at 191.555,-178.394 h1.36
  text "2. ALL DIMENSIONS ARE IN" at 107.142,-179.986 h0.73
  text "REL:" at 138.892,-179.986 h0.73
  text "MATERIAL:  SEE NOTE" at 75.392,-181.891 h0.73
  text "MM (INCHES)." at 109.364,-181.891 h0.73
  text "MFG:" at 138.892,-182.526 h0.73
  text "FINISH:  SEE NOTE" at 75.392,-184.113 h0.73
  text "SIZE" at 170.577,-184.942 h0.73
  text "CAGE CODE NO." at 176.609,-184.942 h0.73
  text "DRAWING NO." at 192.802,-184.942 h0.73
  text "REV:" at 230.584,-184.942 h0.73
  text "ENG.MGR:" at 138.892,-185.066 h0.73
  text "3. INTERPRET DRAWING IN" at 107.142,-186.653 h0.73
  text "F2837x controlCARD" at 203.073,-187.491 h1.59
  text "1.3" at 230.583,-187.592 h1.52
  text "OTHER:" at 138.892,-187.606 h0.73
  text "B" at 171.797,-188.469 h1.81
  text "ACCORDANCE WITH" at 109.364,-188.558 h0.73
  text "OTHER:" at 138.892,-190.146 h0.73
  text "DOD-STD-100." at 109.364,-190.463 h0.73
  text "SCALE:" at 170.877,-192.067 h0.73
  text "SHEET     OF" at 214.181,-192.067 h0.73
  text "DO NOT SCALE DRAWING" at 78.804,-192.102 h0.73
  text "1:1" at 177.897,-192.15 h0.91
  text "1    1" at 220.121,-192.306 h0.91
  text "OTHER:" at 138.892,-192.686 h0.73
  text "2" at 156.383,-198.529 h2.72
  text "8" at -161.117,-198.656 h2.72
  text "7" at -107.142,-198.656 h2.72
  text "6" at -56.342,-198.656 h2.72
  text "5" at -2.367,-198.656 h2.72
  text "4" at 48.433,-198.656 h2.72
  text "3" at 105.583,-198.656 h2.72
  text "1" at 210.358,-198.656 h2.72
Drafting Layer 1:
  lines w0.254: -9.815,-37.341 87.503,-37.341 ; 25.341,-51.361 25.341,-34.597 ; 26.951,-54.003 26.951,-31.143 ; 64.035,-46.383 64.035,-0.917
Drafting Layer 2:
  circle w0.254: c-2.754,-34.547 r0.991
  circle w0.254: c56.656,-34.547 r0.991
  lines w0.254: -8.685,-39.677 85.725,-39.677 ; -7.72,-42.319 85.598,-42.319
Film Outline:
  lines w0.203: 31.373,-161.928 31.373,-112.398 214.253,-112.398 ; 31.373,-161.928 214.253,-161.928 ; 31.373,-161.928 31.373,-154.308 72.013,-154.308 ; 31.373,-161.928 72.013,-161.928 ; 72.013,-161.928 72.013,-154.308 ; 72.013,-161.928 103.763,-161.928 ; 72.013,-161.928 72.013,-154.308 ; 72.013,-154.308 103.763,-154.308 ; 103.763,-161.928 103.763,-154.308 ; 103.763,-161.928 103.763,-154.308 ; 103.763,-161.928 144.403,-161.928 144.403,-154.308 103.763,-154.308 ; 103.763,-161.928 103.763,-126.368 ; 103.763,-161.928 214.253,-161.928 ; 103.763,-161.928 103.763,-154.308 ; 103.763,-161.928 214.253,-161.928 ; 103.763,-154.308 214.253,-154.308 ; 103.763,-126.368 214.253,-126.368 ; 103.763,-126.368 103.763,-144.148 214.253,-144.148 ; 103.763,-126.368 214.253,-126.368 ; 103.763,-126.368 103.763,-112.398 214.253,-112.398 ; 103.763,-126.368 214.253,-126.368 ; 214.253,-161.928 214.253,-112.398 ; 214.253,-161.928 214.253,-126.368 ; 214.253,-161.928 214.253,130.045 -110.46,130.045 -110.46,-161.928 214.253,-161.928 ; 214.253,-161.928 214.253,-154.308 ; 214.253,-154.308 214.253,-144.148 ; 214.253,-154.308 179.963,-154.308 179.963,-144.148 214.253,-144.148 ; 214.253,-144.148 214.253,-126.368 ; 214.253,-126.368 214.253,-112.398
  text "Artwork Designed By:" at 33.151,-115.7 h1.91
  text "Artwork Designed For:" at 105.541,-115.7 h1.91
  text "TEXAS INSTRUMENTS" at 142.218,-122.176 h2.54
  text "Willow Spring Technical Services Corp." at 38.612,-124.031 h1.91
  text "Board Description:" at 105.541,-129.67 h1.91
  text "1185 Centre Street" at 55.518,-129.962 h1.91
  text "F28335 controlCARD" at 142.284,-134.876 h2.54
  text "Middleboro, MA 02346" at 52.978,-135.677 h1.91
  text "www.wstscorp.com" at 73.461,-141.709 h1.91
  text "PH 508-947-2709" at 36.468,-142.027 h1.91
  text "Part No:" at 105.541,-147.45 h1.91
  text "Revision:" at 181.741,-147.45 h1.91
  text "1.3" at 202.182,-150.672 h2.54
  text "F2837x controlCARD" at 129.671,-151.26 h2.54
  text "Job No:" at 33.151,-157.61 h1.91
  text "Date:" at 73.791,-157.61 h1.91
  text "LAYER" at 115.557,-158.686 h1.91
  text "TEX.137" at 51.991,-159.006 h2.54
  text "10/05/15" at 84.751,-159.188 h2.54
Primary Solder Mask:
  region: 26.457,-43.142 52.915,-43.142 52.915,-39.649 26.457,-39.649 26.457,-43.142
  region: 0.93,-43.142 23.904,-43.142 23.904,-39.497 0.93,-39.497 0.93,-43.142
  region: 72.151,-43.091 97.587,-43.091 97.587,-39.599 72.151,-39.599 72.151,-43.091
  lines w0.635: -3.364,-35.359 -3.77,-35.359 -3.77,-37.341 0.725,-37.341 0.725,-43.335 24.147,-43.335 24.147,-38.331 cw(c25.341,-38.331) 26.535,-38.331 26.535,-43.335 53.176,-43.335 53.176,-37.341 57.672,-37.341 57.672,-35.334 57.266,-35.334 ; -3.363,-35.36 ccw(c-2.766,-34.57) -1.776,-34.521 -1.789,-34.521 -1.789,-31.143 -6.704,-31.143 -6.704,7.752 99.125,7.752 99.125,-37.338 97.464,-37.338 97.464,-43.233 ; -3.345,-35.359 -3.751,-35.359 -3.751,-37.341 0.745,-37.341 0.745,-43.335 24.166,-43.335 24.166,-38.331 cw(c25.36,-38.331) 26.554,-38.331 26.554,-43.335 53.196,-43.335 53.196,-37.341 57.691,-37.341 57.691,-35.334 57.285,-35.334 ; -3.344,-35.36 ccw(c-2.747,-34.57) -1.757,-34.521 -1.77,-34.521 -1.77,-31.143 -6.621,-31.143 -6.621,7.747 99.125,7.747 99.125,-37.341 97.464,-37.341 97.464,-43.233 ; 57.267,-35.334 cw(c56.669,-34.543) 55.678,-34.547 55.666,-34.547 55.666,-31.143 72.183,-31.143 ; 57.286,-35.334 cw(c56.688,-34.543) 55.697,-34.547 55.685,-34.547 55.685,-31.143 72.183,-31.143 ; 72.183,-43.233 97.464,-43.233 ; 72.183,-43.233 72.183,-31.143 ; 72.183,-43.233 97.464,-43.233 ; 72.183,-43.233 72.183,-31.143
  text "Primary Side Soldermask" at 156.79,-159.049 h1.91
Secondary Solder Mask:
  region: 26.33,-43.142 52.832,-43.142 52.832,-39.649 26.33,-39.649 26.33,-43.142
  region: 72.151,-43.091 97.587,-43.091 97.587,-39.599 72.151,-39.599 72.151,-43.091
  region: 0.762,-43.053 23.736,-43.053 23.736,-39.472 0.762,-39.472 0.762,-43.053
  lines w0.635: -3.364,-35.359 -3.77,-35.359 -3.77,-37.341 0.725,-37.341 0.725,-43.335 24.147,-43.335 24.147,-38.331 cw(c25.341,-38.331) 26.535,-38.331 26.535,-43.335 53.176,-43.335 53.176,-37.341 57.672,-37.341 57.672,-35.334 57.266,-35.334 ; -3.363,-35.36 ccw(c-2.766,-34.57) -1.776,-34.521 -1.789,-34.521 -1.789,-31.143 -6.704,-31.143 -6.704,7.752 99.125,7.752 99.125,-37.338 97.464,-37.338 97.464,-43.233 72.183,-43.233 72.183,-31.143 55.666,-31.143 55.666,-34.547 55.678,-34.547 ccw(c56.669,-34.543) 57.267,-35.334
  text "Secondary Side Soldermask" at 155.044,-159.049 h1.91
Primary Solder Stencil:
  text "Primary Side Solder Stencil" at 155.393,-159.049 h1.91
Secondary Solder Stencil:
  text "Secondary Side Solder Stencil" at 153.647,-159.049 h1.91